# Altium PCB BLDC_driver_sensorless_v2.PcbDoc
Units mil, origin at the board's own origin, x right, y up, seen from the top; angles counter-clockwise.
Board outline 2626.88 x 1780 mil, 2 copper layers (Top Layer, Bottom Layer); 95 components, 64 nets, 263 pads, 50 vias.
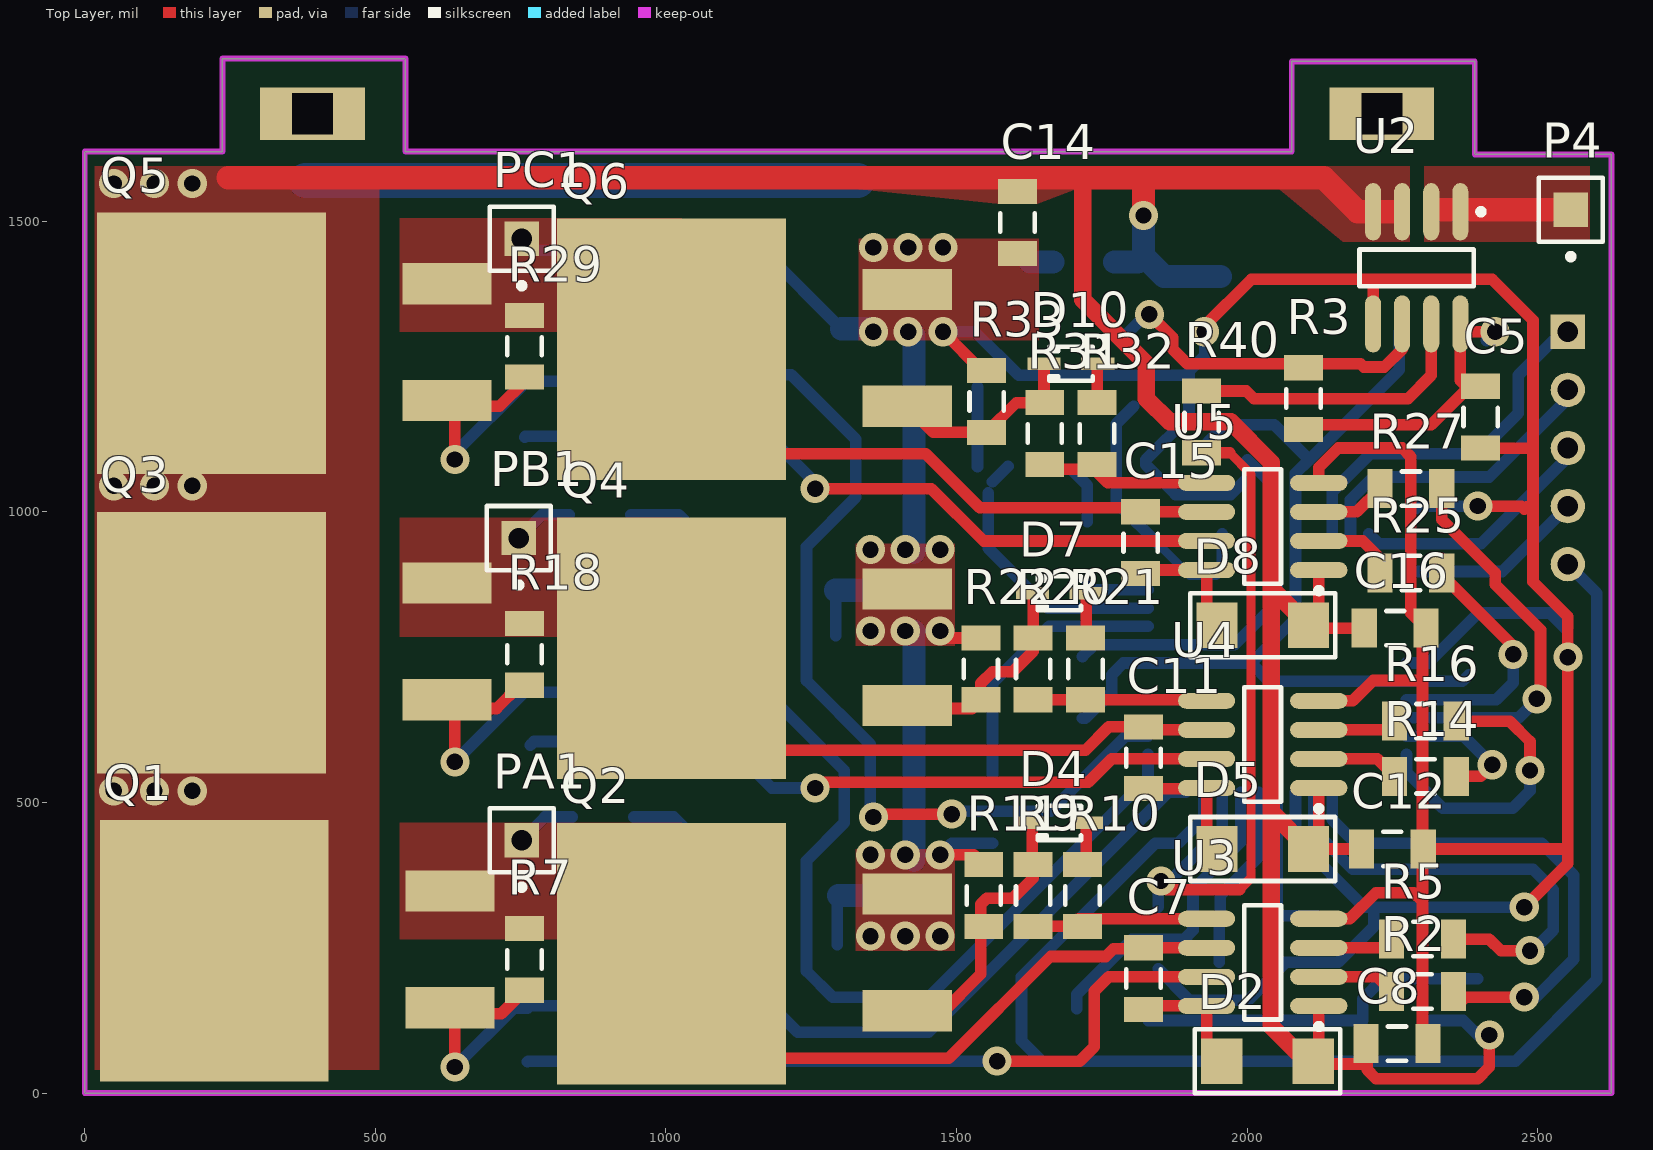
[diagram p0: Top Layer view]
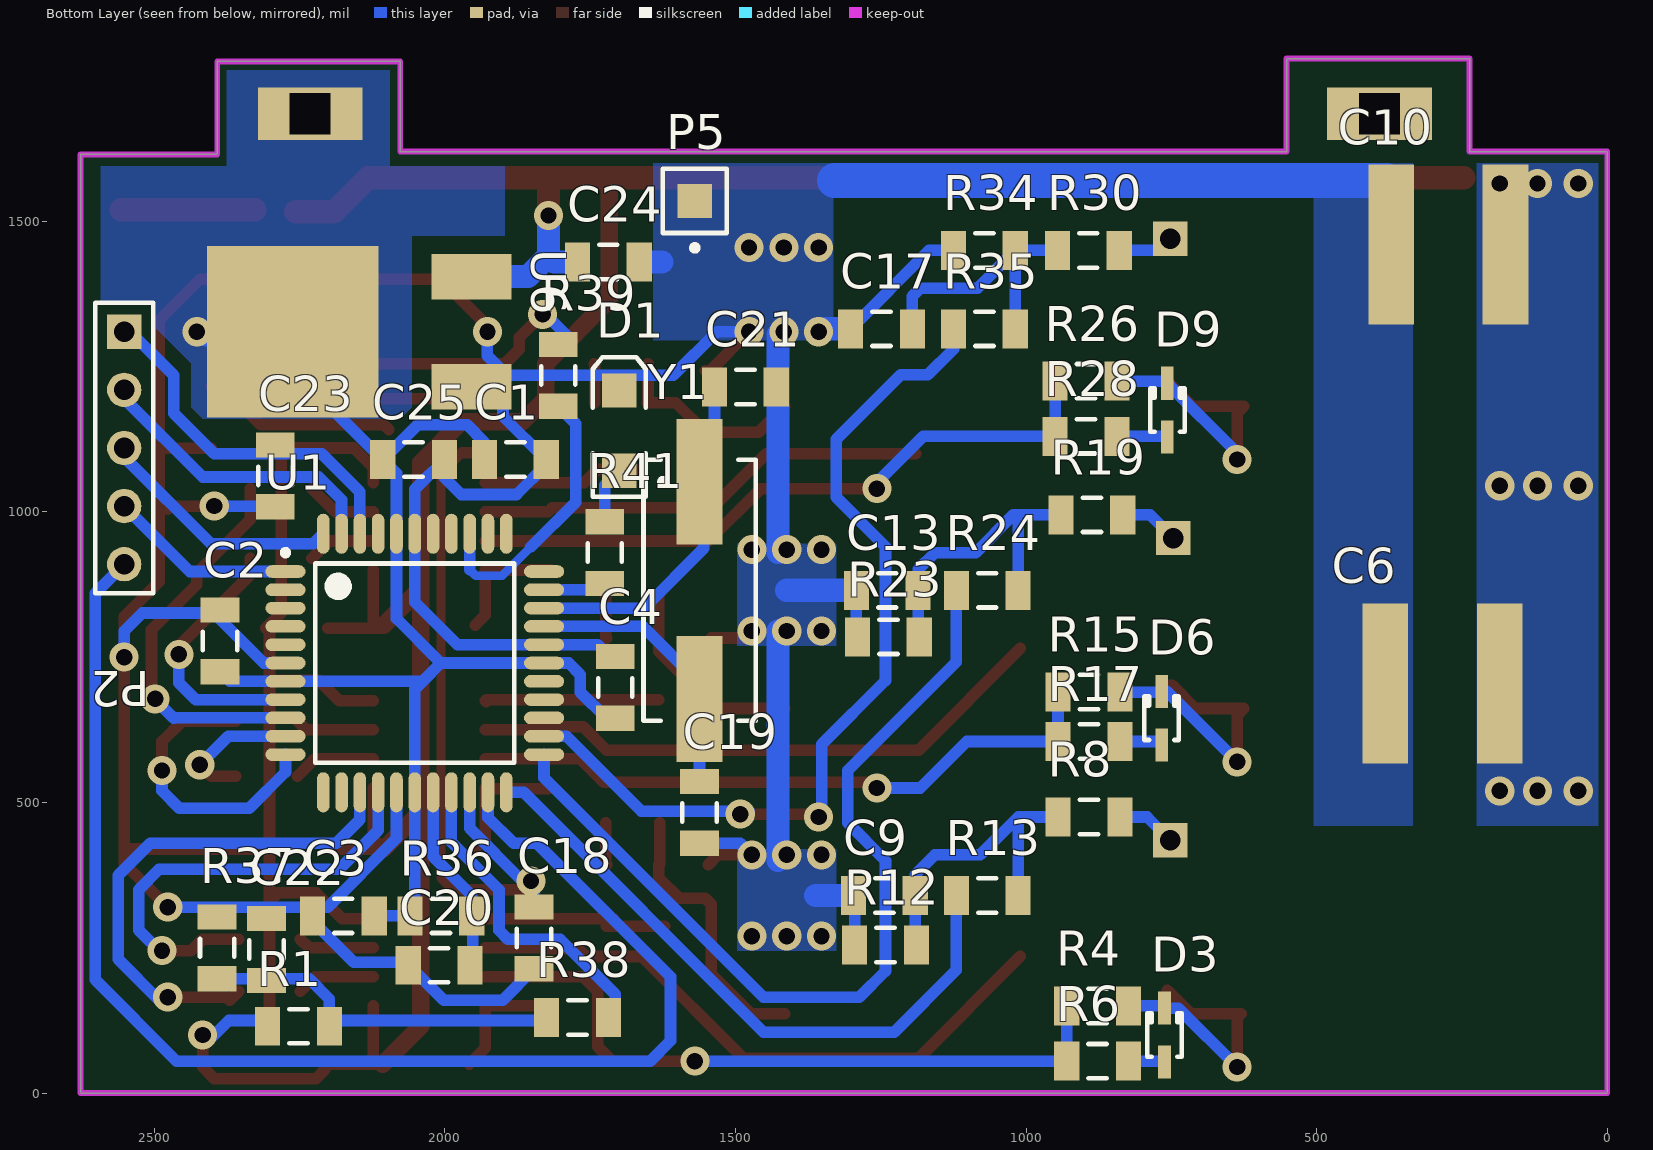
[diagram p1: Bottom Layer view, seen from below]
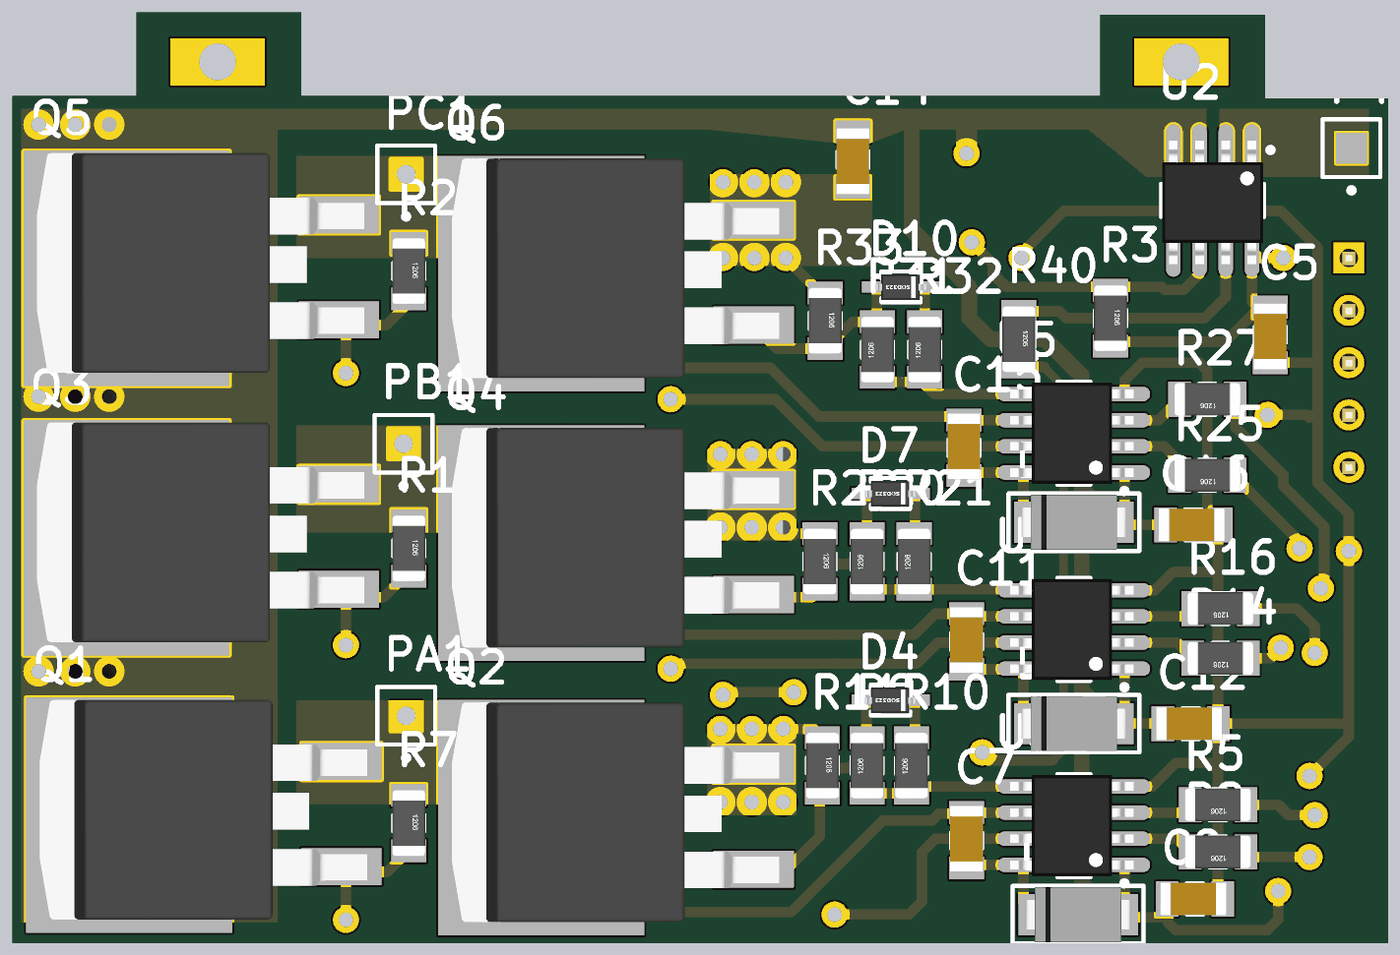
[diagram p2: 3D render of the assembled board from above, using the file's embedded part models]
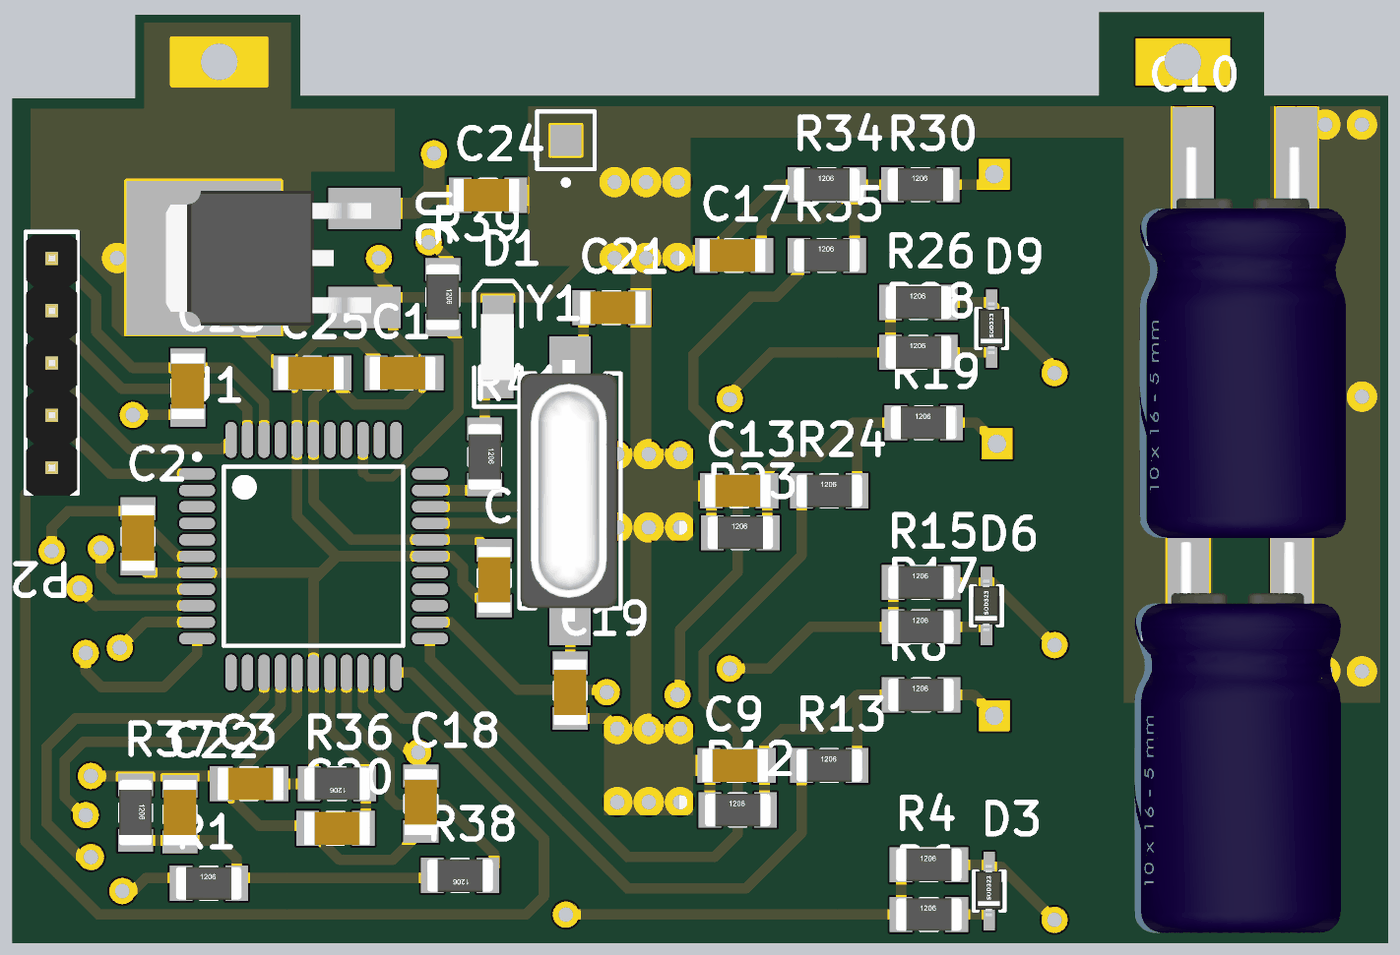
[diagram p3: 3D render of the assembled board from below, using the file's embedded part models]

## Layer stack, top to bottom
Top Solder: solder mask 0.4, Solder Resist, Dk 3.5
Top Layer: signal copper 1.4
Dielectric 1: dielectric 12.6, FR-4, Dk 4.8
Bottom Layer: signal copper 1.4
Bottom Solder: solder mask 0.4, Solder Resist, Dk 3.5

## Board outline
0,0 0,1620 236.88,1620 236.88,1780 551.88,1780 551.88,1620 2076.88,1620 2076.88,1775 2391.88,1775 2391.88,1615 2626.88,1615 2626.88,0

## Design rules (kind name [scope] priority, off if disabled: settings)
Clearance [All] p1: gap=10
HoleSize [All] p1: absolutevalues=TRUE maxlimit=200 minlimit=1 maxpercent=80.000 minpercent=20.000
PolygonConnect [All] p1: connectstyle=Direct reliefconductorwidth=10 reliefentries=4 polygonreliefangle="90 Angle" airgapwidth=10
RoutingVias [All] p1: holewidth=28 width=50 viastyle="Through Hole" minholewidth=28 minwidth=50 maxholewidth=28 maxwidth=50
SolderMaskExpansion [All] p1: expansion=4
Width [All] p1: maxlimit=200 minlimit=15 preferedwidth=20 minimp=50.000000 maximp=50.000000 favimp=50.000000
29 further rules are at their usual default settings.

## Classes and differential pairs
component class BLDC_driver_sensorless_power: C5 C6 C7 C8 C9 C10 C11 C12 C13 C14 C15 C16 C17 C22 D2 D3 D4 D5 D6 D7 D8 D9 D10 P4 P5 PA1 PB1 PC1 Q1 Q2 Q3 Q4 Q5 Q6 R1 R2 R3 R4 R5 R6 R7 R8 R9 R10 R11 R12 R13 R14 R15 R16 R17 R18 R19 R20 R21 R22 R23 R24 R25 R26 R27 R28 R29 R30 R31 R32 R33 R34 R35 R37 R38 U2 U3 U4 U5
component class BLDC_driver_sensorless_logic: C1 C2 C3 C4 C18 C19 C20 C21 C23 C24 C25 D1 P2 R36 R39 R40 R41 U1 U6 Y1

## Components (designator, comment, footprint, x,y, rotation, side; value= is the part's Value field where it differs from the comment)
C1 "Cap SMD" "1206 capacitor" 1876.88,1090 r0 bottom
C2 "Cap SMD" "1206 capacitor" 2386.88,780 r270 bottom
C3 "Cap SMD" "1206 capacitor" 2176.88,305 r180 bottom
C4 "Cap SMD" "1206 capacitor" 1706.88,700 r270 bottom
C5 "Cap SMD" "1206 capacitor" 2401.88,1165 r270 top
C6 "Cap pol" "Cap elec 10x16-5 Surface Mount" 185,705 r0 bottom
C7 "Cap SMD" "1206 capacitor" 1821.88,195 r90 top
C8 "Cap SMD" "1206 capacitor" 2260,85 r180 top
C9 "Cap SMD" "1206 capacitor" 1241.88,340 r0 bottom
C10 "Cap pol" "Cap elec 10x16-5 Surface Mount" 175,1460 r0 bottom
C11 "Cap SMD" "1206 capacitor" 1821.88,575 r90 top
C12 "Cap SMD" "1206 capacitor" 2251.88,420 r180 top
C13 "Cap SMD" "1206 capacitor" 1236.88,865 r0 bottom
C14 "Cap SMD" "1206 capacitor" 1605,1500 r270 top
C15 "Cap SMD" "1206 capacitor" 1816.88,945 r90 top
C16 "Cap SMD" "1206 capacitor" 2256.88,800 r180 top
C17 "Cap SMD" "1206 capacitor" 1246.88,1315 r0 bottom
C18 "Cap SMD" "1206 capacitor" 1846.88,265 r90 bottom
C19 "Cap SMD" "1206 capacitor" 1561.88,485 r270 bottom
C20 "Cap SMD" "1206 capacitor" 2011.88,220 r180 bottom
C21 "Cap SMD" "1206 capacitor" 1485,1215 r180 bottom
C22 "Cap SMD" "1206 capacitor" 2306.88,245 r90 bottom
C23 "Cap SMD" "1206 capacitor" 2291.88,1060 r90 bottom
C24 "Cap Semi" "1206 capacitor" 1716.88,1430 r0 bottom
C25 "Cap Semi" "1206 capacitor" 2051.88,1090 r0 bottom
D1 "LED2" "LED 1206 BLUE" 1700,1140 r90 bottom
D2 "Diode ES1G" DO-214AC 2035,55 r180 top
D3 "1N4148WS" SOD323 761.88,100 r90 bottom
D4 "1N4148WS" SOD323 1676.88,465 r180 top
D5 "Diode ES1G" DO-214AC 2026.88,420 r180 top
D6 "1N4148WS" SOD323 766.88,645 r90 bottom
D7 "1N4148WS" SOD323 1676.88,860 r180 top
D8 "Diode ES1G" DO-214AC 2026.88,805 r180 top
D9 "1N4148WS" SOD323 756.88,1175 r90 bottom
D10 "1N4148WS" SOD323 1696.88,1255 r180 top
P2 "Header 5" HDR1X5 2551.88,1310 r270 bottom
P4 "Plug" PIN1#1 2556.88,1520 r180 top
P5 "Plug" PIN1#1 1570,1535 r0 bottom
PA1 "Plug" PIN1#2 751.88,435 r180 top
PB1 "Plug" PIN1#2 746.88,955 r180 top
PC1 "Plug" PIN1#2 751.88,1470 r180 top
Q1 "STB85NF55T4" TO-263-2 30,5 r90 top
Q2 "STB85NF55T4" TO-263-2 816.88,0 r90 top
Q3 "STB85NF55T4" TO-263-2 25,535 r90 top
Q4 "STB85NF55T4" TO-263-2 816.88,525 r90 top
Q5 "STB85NF55T4" TO-263-2 25,1050 r90 top
Q6 "STB85NF55T4" TO-263-2 816.88,1040 r90 top
R1 "Res3" "1206 resistor" 2251.88,115 r180 bottom
R2 "Res3" "1206 resistor" 2301.88,175 r180 top
R3 "Res3" "1206 resistor" 2096.88,1195 r270 top
R4 "Res3" "1206 resistor" 876.88,150 r180 bottom
R5 "Res3" "1206 resistor" 2301.88,265 r180 top
R6 "Res3" "1206 resistor" 876.88,55 r180 bottom
R7 "Res3" "1206 resistor" 756.88,230 r270 top
R8 "Res3" "1206 resistor" 891.88,475 r180 bottom
R9 "Res3" "1206 resistor" 1631.88,340 r90 top
R10 "Res3" "1206 resistor" 1716.88,340 r90 top
R11 "Res3" "1206 resistor" 1546.88,340 r270 top
R12 "Res3" "1206 resistor" 1241.88,255 r180 bottom
R13 "Res3" "1206 resistor" 1066.88,340 r180 bottom
R14 "Res3" "1206 resistor" 2306.88,545 r180 top
R15 "Res3" "1206 resistor" 891.88,690 r180 bottom
R16 "Res3" "1206 resistor" 2306.88,640 r180 top
R17 "Res3" "1206 resistor" 891.88,605 r180 bottom
R18 "Res3" "1206 resistor" 756.88,755 r270 top
R19 "Res3" "1206 resistor" 886.88,995 r180 bottom
R20 "Res3" "1206 resistor" 1631.88,730 r90 top
R21 "Res3" "1206 resistor" 1721.88,730 r90 top
R22 "Res3" "1206 resistor" 1541.88,730 r270 top
R23 "Res3" "1206 resistor" 1236.88,785 r180 bottom
R24 "Res3" "1206 resistor" 1066.88,865 r180 bottom
R25 "Res3" "1206 resistor" 2281.88,895 r180 top
R26 "Res3" "1206 resistor" 896.88,1225 r180 bottom
R27 "Res3" "1206 resistor" 2281.88,1040 r180 top
R28 "Res3" "1206 resistor" 896.88,1130 r180 bottom
R29 "Res3" "1206 resistor" 756.88,1285 r270 top
R30 "Res3" "1206 resistor" 893.02,1449.99 r180 bottom
R31 "Res3" "1206 resistor" 1651.88,1135 r90 top
R32 "Res3" "1206 resistor" 1741.88,1135 r90 top
R33 "Res3" "1206 resistor" 1551.88,1190 r270 top
R34 "Res3" "1206 resistor" 1071.88,1449.99 r180 bottom
R35 "Res3" "1206 resistor" 1071.88,1315 r180 bottom
R36 "Res3" "1206 resistor" 2006.88,305 r0 bottom
R37 "Res3" "1206 resistor" 2391.88,250 r270 bottom
R38 "Res3" "1206 resistor" 1771.88,130 r0 bottom
R39 "Res3" "1206 resistor" 1805,1235 r270 bottom
R40 "Res3" "1206 resistor" 1921.88,1155 r270 top
R41 "Res3" "1206 resistor" 1725,930 r270 bottom
U1 "DSPIC30F3011-30I/PT" TQFP-PT44_N 2051.88,740 r180 bottom
U2 "ACS711" SOIC8 2291.88,1420 r270 top
U3 "FAN7382M" SOIC8 2026.88,225 r180 top
U4 "FAN7382M" SOIC8 2026.88,600 r180 top
U5 "FAN7382M" SOIC8 2026.88,975 r180 top
U6 "AP1117ID50G" TO-252 2241.88,1310 r180 bottom
Y1 "XTAL" HC49/US 1561.88,860 r270 bottom

## Footprints (in the part's own frame and the unit in brackets; to place one, negate y for a bottom-side part, rotate by r counter-clockwise, add the part's x,y. Pads: shape width x height; smd on the part's side, far side on the other; paste and mask are expansions set on the pad)
"1206 capacitor" [mm]
  rect 1.1x1.7 smd: 1(-1.299,0) 2(1.401,0)
  silkscreen extent -0.35,-0.75 0.45,0.75, body extent -1.47,-0.8 1.73,0.8, height 1
"1206 resistor" [mm]
  rect 1.1x1.7 smd: 1(-1.35,0) 2(1.35,0)
  silkscreen extent -0.4,-0.75 0.4,0.75, body extent -1.6,-0.8 1.6,0.8, height 1
"Cap elec 10x16-5 Surface Mount" [mm]
  rect 2x7 smd: 1(0,0) 2(5,0)
  body extent -2.4,-1.6 7.6,17.4, height 10
DO-214AC [mm]
  rect 1.8x2 smd: A(-2,0) K(2,0)
  silkscreen extent -3.17,-1.4 3.17,1.4, body extent -2.55,-1.33 2.55,1.33, height 2.17
HC49/US [mm] "Crystal oscillator smd"
  rect 5.5x2 smd: 1(-4.877,0) 2(4.623,0)
  silkscreen extent -5.83,-2.45 5.57,2.45, body extent -6.48,-2.41 6.22,2.29, height 4.2
HDR1X5 [mm] "Connector; Header; 5 Position"
  rect 1.5x1.5 hole 0.9: 1(0,0)
  round 1.5 hole 0.9: 2(2.54,0) 3(5.08,0) 4(7.62,0) 5(10.16,0)
  silkscreen extent -1.27,-1.27 11.43,1.27, body extent -1.15,-1.25 11.55,1.25, height 8.2
"LED 1206 BLUE" [mm] "SMT BLUE LED; 2 Flat Leads"
  rect 1.5x1.5 smd: 1(-1.75,0) 2(1.75,0)
  silkscreen extent -2.9,-1.15 3.2,1.15, body extent -1.6,-0.79 1.6,0.81, height 1.11
PIN1#1 [mm] "Connector; Plug"
  rect 1.5x1.5 smd: 1(0,0)
  silkscreen extent -1.4,-1.4 1.4,2.17
PIN1#2 [mm] "Connector; Plug"
  rect 1.5x1.5 hole 0.9: 1(0,0)
  silkscreen extent -1.4,-1.4 1.4,2.17
SOD323 [mm]
  rect 1.45x0.55 smd: 1(1.175,0) 2(-1.175,0)
  silkscreen extent -0.95,-0.75 0.95,0.75, body extent -1.22,-0.61 1.28,0.64, height 1
SOIC8 [mm]
  oval 2.5x0.7 smd: 1(-2.45,1.905) 2(-2.45,0.635) 3(-2.45,-0.635) 4(-2.45,-1.905) 5(2.45,-1.905) 6(2.45,-0.635) 7(2.45,0.635) 8(2.45,1.905)
  silkscreen extent -2.57,-2.5 0.8,2.93, body extent -2.9,-2.45 3.1,2.45, height 1.75
TO-252 [mm] "3 pins"
  rect 3.5x2 smd: 1(7.3,-2.4) 3(7.3,2.4)
  rect 7.5x7.5 smd: 2(-0.5,0)
  body extent -2.33,-3.27 7.61,3.27, height 2.29
TO-263-2 [mm] "D2PAK, 2 leads"
  rect 1.8x3.9 smd: 1(3.6,-15.2) 3(8.7,-15.2)
  rect 11.43x10 smd: tab(6.1,-4.9)
  body extent 1.03,-16.44 11.7,-0.56, height 4.83
TQFP-PT44_N [mm] "Thin QFP, 44-Leads, Body 10x10mm, Pitch 0.8mm, IPC Medium Density"
  oval 1.75x0.55 smd: 1(-5.65,4) 2(-5.65,3.2) 3(-5.65,2.4) 4(-5.65,1.6) 5(-5.65,0.8) 6(-5.65,0) 7(-5.65,-0.8) 8(-5.65,-1.6) 9(-5.65,-2.4) 10(-5.65,-3.2) 11(-5.65,-4) 23(5.65,-4) 24(5.65,-3.2) 25(5.65,-2.4) 26(5.65,-1.6) 27(5.65,-0.8) 28(5.65,0) 29(5.65,0.8) 30(5.65,1.6) 31(5.65,2.4) 32(5.65,3.2) 33(5.65,4)
  oval 0.55x1.75 smd: 12(-4,-5.65) 13(-3.2,-5.65) 14(-2.4,-5.65) 15(-1.6,-5.65) 16(-0.8,-5.65) 17(0,-5.65) 18(0.8,-5.65) 19(1.6,-5.65) 20(2.4,-5.65) 21(3.2,-5.65) 22(4,-5.65) 34(4,5.65) 35(3.2,5.65) 36(2.4,5.65) 37(1.6,5.65) 38(0.8,5.65) 39(0,5.65) 40(-0.8,5.65) 41(-1.6,5.65) 42(-2.4,5.65) 43(-3.2,5.65) 44(-4,5.65)
  silkscreen extent -5.77,-4.35 4.35,4.95, body extent -5,-5 5,5, height 1.2

## Part data
C1 C2 C3 C4 C5 C7 C8 C9 C11 C12 C13 C14 C15 C16 C17 C18 C19 C20 C21 C22 C23: "SMD capacitor"
C6 C10: "Capa pol through hole"
C24 C25: "Capacitor (Semiconductor SIM Model)"
D1: "Typical RED, GREEN, YELLOW, AMBER GaAs LED"
D2 D5 D8: "1.0A SURFACE MOUNT SUPER-FAST RECTIFIER"
D3 D4 D6 D7 D9 D10: "Diode commutation"
P2: "Header, 5-Pin"
Q1 Q2 Q3 Q4 Q5 Q6: "MOSFET Canal-N, 80A 55V"
R1 R2 R3 R4 R5 R6 R7 R8 R9 R10 R11 R12 R13 R14 R15 R16 R17 R18 R19 R20 R21 R22 R23 R24 R25 R26 R27 R28 R29 R30 R31 R32 R33 R34 R35 R36 R37 R38 R39 R40 R41: "Resistor"
U1: "High-Performance 16-bit Digital Signal Controller, 24 KB Flash, 1 KB SRAM, 1 KB EEPROM, 44-Pin TQFP, Industrial Temperature"
U2: "+/-12A HALL EFFECT CURRENT SENSOR"
U3 U4 U5: "High and Low Side Gate Driver"
U6: "LDO Voltage Regulator"
Y1: "Crystal Oscillator"

## Free pads (board coordinates)
  rect 180x90 hole 70 square: 0(391.88,1685) 0(2231.88,1685)

## Via types
v1: diameter 50, hole 28, Top Layer to Bottom Layer, 50 vias

## Nets (pads, with @x,y where several pads share a name; then routed paths per layer and width w, separated by ;. In a path a pad name is that pad's centre, name@x,y a point inside that pad or via, vN(x,y) a via of type N, cw(c..) or ccw(c..) an arc to the next point about the centre after c; other vN are vias at no path point)
COMPWM: C23.2 P2.1 U1.42 | length 629.8
  Bottom Layer w20: U1.42 2146.36,1034.49 2211.88,1100 2396.88,1100 2466.88,1170 2466.88,1235 2541.88,1310 P2.1
CURRENT: R40.1 U2.7 | length 505.6
  Top Layer w20: R40.1 1998.73,1208.15 2011.88,1195 2276.88,1195 2316.88,1235 U2.7
FAULT: R3.1 R39.1 U2.6 | length 609.2
  Top Layer w20: v1(1831.88,1340) 1871.88,1300 1871.88,1280 1896.88,1255 2195.14,1255 2200.81,1249.33 2236.21,1249.33 2266.88,1280 U2.6
  Bottom Layer w20: R39.1@1781.88,1295 1826.88,1340 v1(1831.88,1340)
GND: C1.1 C2.1 C3.1 C4.1 C5.2 C6.2 C8.1 C9.2 C10.2 C12.1 C13.2 C14.2 C16.1 C17.2 C18.1 C19.2 C20.1 C21.2 C22.2 C23.1 C24.1 C25.1 D1.2 P5.1 Q2.3 Q4.3 Q6.3 R11.1 R12.1 R22.1 R23.1 R33.1 R34.1 R37.1 U1.6 U1.16 U1.29 U1.39 U2.5 U3.4 U4.4 U5.4 U6.1 | length 9643.2
  Top Layer w20: v1(1471.88,410) 1530.02,410 R11.1 ; v1(1471.88,795) v1@1478.73,788.15 ; v1(1476.88,1310) 1543.73,1243.15 R33.1 ; v1@1478.73,783.15 R22.1 ; v1(1926.88,1310) 1926.88,1320 2006.88,1400 2216.88,1400 ; U3.4 2176.88,300 2221.88,345 2286.88,345 2301.88,330 ; U4.4 2181.88,675 2216.88,710 2301.88,710 ; U5.4 2123.33,1076.46 2156.88,1110 2266.88,1110 2281.88,1095 2281.88,826.15 C16.1 ; U2.5 2216.88,1400 ; C16.1@2301.88,793.86 2301.88,710 ; C12.1 2551.87,420.01 ; C8.1@2313.02,98.85 2301.88,110 2301.88,330 ; v1@2401.87,1005.01 v1(2396.88,1010) 2471.88,1010 2476.88,1005 2480.73,1008.85 ; C5.2 2486.72,1109.85 ; v1(2476.87,319.99) 2551.88,395 v1(2551.88,750) 2551.88,820 2491.88,880 2491.88,1330 2421.88,1400 2216.88,1400 ; 2301.88,330 2301.88,710
  Bottom Layer w20: R34.1 1167.04,1449.99 C17.2 ; R23.1@1292.03,787 C13.2 ; R12.1 C9.2@1295.02,338 ; v1@1351.87,1315.01 v1(1356.88,1310) ; v1(1471.88,410) 1491.72,429.85 C19.2 ; v1(1476.88,1310) 1531.88,1310 1606.88,1235 U6.1@1891.88,1235 ; C4.1@1716.88,751.15 1737.23,771.5 U1.29 1978.37,771.5 2051.88,845 U1.39 2051.88,1038.86 C25.1 2000.73,1058.85 1971.88,1030 1876.88,1030 1825.73,1081.15 C1.1 1900,1164.28 1900,1241.98 1926.88,1268.86 v1(1926.88,1310) ; C18.1 1900.72,160 2001.88,160 C20.1@2064.95,223.07 ; C20.1@2063.02,224.99 2156.87,224.99 2218.02,286.15 C3.1@2218.02,319.99 ; U1.16 2083.37,438.5 2201.88,319.99 C3.1@2218.02,319.99 ; U1.6 2311.88,740 2398.02,826.15 2520.73,826.15 2551.88,795 v1(2551.88,750) ; C23.1 2295.72,1005 2300.72,1010 v1(2396.88,1010) ; v1(2476.87,319.99) C3.1@2218.02,319.99
  Bottom Layer w40: C13.2 1411.87,865.01 ; C9.2 1361.88,340.01 ; C17.2 v1@1351.87,1315.01 ; v1@1426.88,400 v1@1426.88,795 ; v1@1426.88,930 v1@1426.88,1305 ; 1626.88,1430.01 C24.1
  Bottom Layer w60: C10.2@380,1570 1330,1570
  other v1: 1351.88,270 1411.88,270 1471.88,270 1351.88,410 1411.88,410 1351.88,795 1411.88,795 1351.88,935 1411.88,935 1471.88,935 1416.88,1310 1356.88,1455 1416.88,1455 1476.88,1455
HIN1: R2.1 U1.14 | length 893.3
  Top Layer w20: R2.1 2370.02,160 2375.02,165 v1(2476.88,165)
  Bottom Layer w20: U1.14 2146.36,470.51 2186.88,430 2506.88,430 2561.88,375 2561.88,230 2491.88,160 2486.88,165 v1(2476.88,165)
HIN2: R14.1 U1.10 | length 238
  Top Layer w20: R14.1 2401.88,545 v1(2421.88,565)
  Bottom Layer w20: U1.10 2372.86,614.02 v1(2421.88,565)
HIN3: R25.1 U1.8 | length 460.5
  Top Layer w20: R25.1@2335.02,920 2335.02,891.85 2457.88,769 v1(2457.88,755)
  Bottom Layer w20: U1.8 2428.88,677.01 2457.88,706 v1(2457.88,755)
LIN1: R5.1 U1.15 | length 772.4
  Top Layer w20: R5.1 2416.88,265 2436.88,245 v1(2486.88,245)
  Bottom Layer w20: U1.15 2114.87,452.01 2181.88,385 2491.88,385 2526.88,350 2526.88,280 v1@2496.88,250
LIN2: R16.1 U1.11 | length 507.2
  Top Layer w20: R16.1 2451.88,640 2486.88,605 v1(2486.88,555)
  Bottom Layer w20: U1.11 2274.32,552.56 2336.88,490 2456.88,490 2486.88,520 v1(2486.88,555)
LIN3: R27.1 U1.9 | length 673.7
  Top Layer w20: R27.1 2335.02,986.85 2426.88,895 2426.88,875 2504.88,797 2504.88,769.47 2504.88,684.82 v1(2498.47,678.41)
  Bottom Layer w20: U1.9 2466.88,645.51 ; 2466.88,645 2498.47,676.59 v1(2498.47,678.41)
MCLR: C20.2 R36.1 U1.18 | length 307
  Bottom Layer w20: C20.2@1951.88,224.99 R36.1@1951.88,291.85 ; R36.1 1953.73,340 2020.38,406.65 U1.18
NetC7_1: C7.1 D2.K U3.8 | length 213.9
  Top Layer w20: C7.1@1828.03,150 U3.8 1930.42,77.72 D2.K@1958.13,50
NetC7_2: C7.2 PA1.1 Q1.3 Q2.tab R7.1 R8.2 U3.6 | length 1176.6
  Top Layer w20: Q2.tab@1009.79,235.16 1184.95,60 1486.88,60 1661.88,235 1756.88,235 1770.07,248.2 1821.88,248.2 C7.2 1822.03,250 U3.6
  Bottom Layer w20: PA1.1 791.88,475 R8.2
NetC9_1: C9.1 R8.1 R12.2 R13.2 | length 540.8
  Bottom Layer w20: R8.1 1013.73,475 ; R13.2 1013.73,475 ; R12.2@1190.73,257 C9.1 1190.73,376.15 1156.88,410 1078.73,410 1013.73,475
NetC11_1: C11.1 D5.K U4.8 | length 221.4
  Top Layer w20: C11.1 1929.27,523.85 U4.8 1930.42,437.72 D5.K
NetC11_2: C11.2 PB1.1 Q3.3 Q4.tab R18.1 R19.2 U4.6 | length 1115.4
  Top Layer w20: Q4.tab 1184.95,590 1721.88,590 1762.03,630.15 C11.2 1827.03,625 U4.6
  Bottom Layer w20: PB1.1 786.88,995 R19.2
NetC13_1: C13.1 R19.1 R23.2 R24.2 | length 528.7
  Bottom Layer w20: R19.1 1013.73,995 ; R24.2 1013.73,995 ; R23.2@1185.73,787 C13.1 1185.73,901.15 1156.88,930 1086.88,930 1021.88,995 1013.73,995
NetC15_1: C15.1 D8.K U5.8 | length 216.4
  Top Layer w20: C15.1@1816.88,898.85 1818.03,900 U5.8 1930.42,822.72 D8.K
NetC15_2: C15.2 PC1.1 Q5.3 Q6.tab R29.1 R30.2 U5.6 | length 870.9
  Top Layer w20: Q6.tab@1189.95,1100 1446.88,1100 1539.88,1007 1815.03,1007 C15.2@1816.88,1005.15 ; C15.2@1822.03,1000 U5.6
  Bottom Layer w20: PC1.1 771.88,1449.99 R30.2
NetC17_1: C17.1 R30.1 R34.2 R35.2 | length 473.3
  Bottom Layer w20: R30.1 R34.2 ; R35.2 R34.2 ; C17.1 1195.73,1371.15 1181.88,1385 1083.72,1385 R34.2
NetC18_2: C18.2 R40.2 U1.20 | length 1200.5
  Top Layer w16: 1970.02,1101.85 2006.88,1065 2006.88,370 1986.88,350
  Top Layer w20: v1@1861.88,350 1986.88,350 ; R40.2 1970.02,1101.85
  Bottom Layer w20: C18.2 1846.87,359.99 v1(1851.88,365) 1866.88,365 1957.39,455.51 U1.20
NetC22_1: C22.1 R1.2 R37.2 R38.2 | length 618.2
  Bottom Layer w20: R38.2@1830.02,125 2198.73,125 2198.73,161.85 2233.73,196.85 R37.2@2396.88,196.85
NetD1_1: D1.1 R41.1 | length 98.3
  Bottom Layer w20: D1.1 1725,1046.1 R41.1
NetD3_1: D3.1 Q1.1 R4.2 R7.2 | length 468
  Top Layer w20: v1(636.88,45) 636.88,130.16 630.3,136.73 716.76,136.73 R7.2
  Bottom Layer w20: v1(636.88,45) 738.13,146.26 D3.1 765.62,150 R4.2
NetD3_2: D3.2 R6.2 | length 62.4
  Bottom Layer w20: D3.2 763.13,55 R6.2
NetD4_1: D4.1 Q2.1 R9.2 R11.2 | length 477.2
  Top Layer w20: Q2.1@1415.3,136.73 1473.61,136.73 1541.88,205 1541.88,286.85 1541.88,325 1551.88,335 1596.88,335 1631.88,370 R9.2 ; R9.2@1630.62,394.41 D4.1
NetD4_2: D4.2 R10.2 | length 72.4
  Top Layer w20: R10.2@1721.88,393.15 1723.13,394.41 D4.2
NetD6_1: D6.1 Q3.1 R15.2 R18.2 | length 497.3
  Top Layer w20: v1(636.88,570) 636.88,650.16 625.3,661.73 708.61,661.73 748.73,701.85 R18.2
  Bottom Layer w20: v1(636.88,570) 758.13,691.26 D6.1 768.13,690 R15.2
NetD6_2: D6.2 R17.2 | length 74.4
  Bottom Layer w20: D6.2 773.13,605 R17.2
NetD7_1: D7.1 Q4.1 R20.2 R22.2 | length 374.3
  Top Layer w20: Q4.1@1415.3,661.73 1526.76,661.73 R22.2 1541.88,705 1561.88,725 1596.88,725 1631.88,760 R20.2 1631.88,858.74 D7.1
NetD7_2: D7.2 R21.2 | length 77.4
  Top Layer w20: R21.2 1723.13,784.41 D7.2
NetD9_1: D9.1 Q5.1 R26.2 R29.2 | length 522.2
  Top Layer w20: v1(636.88,1090) 636.88,1170.16 625.3,1181.73 713.61,1181.73 756.88,1225 R29.2
  Bottom Layer w20: v1(636.88,1090) 636.88,1101.26 D9.1 760.62,1225 R26.2
NetD9_2: D9.2 R28.2 | length 87.4
  Bottom Layer w20: D9.2 758.13,1130 R28.2
NetD10_1: D10.1 Q6.1 R31.2 R33.2 | length 343.8
  Top Layer w20: Q6.1 1460.18,1136.85 R33.2 1603.17,1188.15 R31.2 1650.62,1189.41 D10.1
NetD10_2: D10.2 R32.2 | length 67.4
  Top Layer w20: R32.2 1741.88,1253.74 D10.2
NetR2_2: R2.2 U3.2 | length 135.7
  Top Layer w20: U3.2 2223.73,200 R2.2
NetR4_1: R4.1 R6.1 U3.7 | length 1211.1
  Top Layer w20: v1(1570,55) 1711.88,55 1736.88,80 1736.88,175 1761.88,200 U3.7
  Bottom Layer w20: R4.1 R6.1 v1(1570,55)
NetR5_2: R5.2 U3.3 | length 131.6
  Top Layer w20: U3.3 2233.73,250 R5.2
NetR9_1: R9.1 R10.1 U3.5 | length 320.4
  Top Layer w20: R9.1@1621.88,286.85 R10.1@1721.88,286.85 ; R10.1@1710.02,300 U3.5
NetR14_2: R14.2 U4.2 | length 142.8
  Top Layer w20: U4.2 2223.73,575 R14.2
NetR15_1: R15.1 R17.1 U4.7 | length 1124.2
  Top Layer w20: v1(1256.88,525) 1266.88,535 1726.88,535 1766.88,575 U4.7
  Bottom Layer w20: R15.1 R17.1 1101.88,605 1181.88,525 v1(1256.88,525)
NetR16_2: R16.2 U4.3 | length 136.6
  Top Layer w20: U4.3 2238.73,625 R16.2
NetR20_1: R20.1 R21.1 U4.5 | length 301.9
  Top Layer w20: R20.1 R21.1 1928.57,676.85 U4.5 U4.5@1928.57,673.15
NetR25_2: R25.2 U5.2 | length 117.8
  Top Layer w20: U5.2 2198.73,950 R25.2@2228.73,920
NetR26_1: R26.1 R28.1 U5.7 | length 1155.8
  Top Layer w20: v1(1256.88,1040) 1426.88,1040 1456.88,1040 1546.88,950 U5.7
  Bottom Layer w20: R26.1 R28.1 1176.88,1130 1256.88,1050 v1(1256.88,1040)
NetR27_2: R27.2 U5.3 | length 122
  Top Layer w20: U5.3 2188.73,1000 R27.2
NetR31_1: R31.1 R32.1 U5.5 | length 268.1
  Top Layer w20: R31.1@1671.88,1073.15 1736.88,1073.15 1760.02,1050 U5.5
NetR39_2: R39.2 U1.36 | length 478.6
  Bottom Layer w15: 1851.88,940 1901.88,890 1946.88,890 1957.39,900.51
  Bottom Layer w20: R39.2 1775,1151.85 1775,1016.88 1851.88,940 ; 1957.39,900.51 U1.36
NetR41_2: R41.2 U1.32 | length 108.9
  Bottom Layer w20: R41.2 1735.87,865.98 U1.32
OSC1: C19.1 U1.30 Y1.2 | length 477
  Bottom Layer w20: C19.1 Y1.2 1561.88,705 1659.87,802.99 U1.30
OSC2: C21.1 U1.31 Y1.1 | length 588
  Bottom Layer w20: Y1.1@1536.15,1077.73 C21.1 ; Y1.1@1554.38,1032.5 1554.38,937.5 1657.39,834.49 U1.31 ; Y1.1 Y1.1@1588.72,1078.85
PGC/SDI: P2.4 U1.1 | length 324.2
  Bottom Layer w20: U1.1 2439.36,897.48 P2.4
PGD/SDO: P2.3 U1.44 | length 427.3
  Bottom Layer w20: U1.44 2226.8,945 2402.59,945 2551.88,1094.29 P2.3
RX: U1.3
S\S\: P2.5 U1.21 | length 2379.3
  Bottom Layer w20: U1.21 1925.89,474.02 1881.88,430 1841.88,430 1611.88,200 1611.88,90 1646.88,55 2461.88,55 2601.88,195 2601.88,860 P2.5
SCK: P2.2 U1.43 | length 519.6
  Bottom Layer w20: U1.43 2177.86,1020.98 2216.88,1060 2416.88,1060 2551.88,1195 P2.2
TX: U1.2
VA: R13.1 U1.22 | length 1117.7
  Bottom Layer w20: R13.1 1120.02,211.85 1226.88,105 1451.88,105 1864.43,517.56 U1.22
VB: R24.1 U1.23 | length 1561.9
  Bottom Layer w20: R24.1 1120.02,741.85 1306.88,555 1306.88,465 1241.88,400 1241.88,210 1286.88,165 1451.88,165 1829.43,542.56 U1.23
VBAT: P4.1 U2.1 U2.2 | length 230
  Top Layer w40: U2.2@2326.88,1520 P4.1
VBATSENS: C6.1 C8.2 C10.1 C12.2 C14.1 C16.2 C24.2 D2.A D5.A D8.A Q1.tab Q3.tab Q5.tab R1.1 U2.3 U2.4 U3.1 U4.1 U5.1 U6.3 | length 5284.6
  Top Layer w20: D2.A@2106.88,50 2115.62,50 2206.72,50.01 2206.72,40.15 2221.88,25 2396.88,25 2416.88,45 v1(2416.88,100) ; D8.A@2110.61,800.01 C16.2 ; D2.A@2123.33,57.72 U3.1 ; U4.1 2123.33,437.72 D5.A C12.2 ; D8.A@2123.33,812.73 U5.1
  Top Layer w30: 1716.88,1575 1716.88,1365 1826.88,1255 1826.88,1195 1866.88,1155 1971.88,1155 2041.88,1085 2041.88,868.74 ; D5.A 2041.88,483.75 ; D8.A 2041.88,868.74 ; D2.A@2106.88,50 2041.88,115 2041.88,483.75 ; 2041.88,483.75 2041.88,868.74
  Top Layer w40: 246.88,1575 1716.88,1575 1821.88,1575 ; v1(1821.88,1510) 1821.88,1575 ; U2.3@2256.88,1516.46 U2.4 2190.42,1516.46 2131.88,1575 1821.88,1575
  Bottom Layer w20: U6.3@1953.8,1405.16 U6.3 ; R1.1@2305.02,125 2371.88,125 2396.88,100 v1(2416.88,100)
  Bottom Layer w40: C24.2 1811.72,1430.01 1821.88,1440.16 ; v1(1821.88,1510) 1821.88,1440.16 ; U6.3@1953.8,1405.16 1856.88,1405.16 1821.88,1440.16
  other v1: 50,520 120,520 185,520 50,1045 120,1045 185,1045 50,1565 120,1565 185,1565
VBUS: R38.1 U1.19 | length 542.1
  Bottom Layer w20: R38.1@1706.88,145 1706.88,170 1801.88,265 1891.88,265 1906.88,280 1906.88,350 1988.88,432.01 U1.19
VC: R35.1 U1.24 | length 1594.1
  Top Layer w20: v1(1356.88,475) 1351.88,480 v1(1491.88,480)
  Bottom Layer w20: R35.1 1125.02,1279.98 1169.06,1235.94 1215.94,1235.94 1326.88,1125 1326.88,1025 1241.88,940 1241.88,710 1351.88,600 1351.88,480 v1(1356.88,475) ; v1@1476.88,485 v1@1486.88,485 ; v1(1491.88,480) v1@1486.88,485 ; U1.24 1790.89,614.02 1661.88,485 v1@1486.88,485
VDD: C1.2 C2.2 C3.2 C4.2 C5.1 C25.2 pad.0@2231.88,1685 R3.2 R36.2 U1.7 U1.17 U1.28 U1.40 U2.8 U6.2 | length 2667.5
  Top Layer w20: R3.2 2105.02,1150 2316.88,1150 2383.02,1216.15 C5.1 ; C5.1@2378.02,1215.01 2366.88,1226.15 U2.8 2380.42,1310 v1(2426.88,1310)
  Bottom Layer w20: C4.2@1716.88,644.85 1721.72,644.85 1766.88,690 1766.88,720 1786.88,740 U1.28 2006.88,740 ; C1.2 1932.03,1120.15 1961.88,1150 2047.03,1150 C25.2 ; C3.2 R36.2 2051.88,313.15 U1.17 2051.88,695 2038.37,708.5 ; U6.2 2261.56,1244.54 C25.2 ; C2.2@2381.88,719.85 2370.54,708.5 U1.7 2038.37,708.5 ; v1@2411.88,1295 v1(2426.88,1310) ; 2006.88,740 2038.37,708.5 ; 2006.88,740 2083.37,816.5 U1.40 2083.37,1066.35 C25.2
pads on no net: U1.4 U1.5 U1.12 U1.13 U1.25 U1.26 U1.27 U1.33 U1.34 U1.35 U1.37 U1.38 U1.41

## Polygon pours and split planes (outlines as drawn)
VBATSENS on Bottom Layer "Bottom Layer-No Net" (solid, remove dead copper, pour order 34): 225,1600 15,1600 15,460 225,460
GND on Bottom Layer "Bottom Layer-No Net" (solid, remove dead copper, pour order 32): 335,1600 505,1600 505,460 335,460
VDD on Bottom Layer "Bottom Layer-No Net" (solid, remove dead copper, pour order 2): 2411.88,1160 2076.88,1160 2056.88,1180 2056.88,1475 1896.88,1475 1896.88,1595 2095,1595 2095,1760 2375,1760 2375,1595 2591.88,1595 2591.88,1360 2496.88,1360 2496.88,1315 2476.88,1295 2436.88,1255 2436.88,1180 2416.88,1160
GND on Bottom Layer "Bottom Layer-No Net" (solid, remove dead copper, pour order 4): 1496.88,245 1326.88,245 1326.88,420 1496.88,420
GND on Bottom Layer "Bottom Layer-No Net" (solid, remove dead copper, pour order 6): 1496.88,770 1326.88,770 1326.88,945 1496.88,945
GND on Bottom Layer "Bottom Layer-No Net" (solid, remove dead copper, pour order 8): 1641.88,1295 1331.88,1295 1331.87,1600 1641.88,1600
VBATSENS on Top Layer "Bottom Layer-No Net" (solid, remove dead copper, pour order 30): 2280,1565 2280,1465 2165,1465 2055,1555 2055,1595 2280,1595
VBAT on Top Layer "Bottom Layer-No Net" (solid, remove dead copper, pour order 28): 2305,1595 2380,1595 2391.88,1595 2415,1595 2590,1595 2590,1465 2385,1465 2305,1465 2305,1565
VBATSENS on Top Layer "Bottom Layer-No Net" (solid, remove dead copper, pour order 26): 1705,1555 1640,1530 1570,1530 1331.88,1555 1331.88,1595 1705,1595
VBATSENS on Top Layer "Bottom Layer-No Net" (solid, remove dead copper, pour order 10): 506.88,40 16.88,40 16.88,1595 506.88,1595
GND on Top Layer "Bottom Layer-No Net" (solid, remove dead copper, pour order 14): 1496.88,245 1326.88,245 1326.88,420 1496.88,420
GND on Top Layer "Bottom Layer-No Net" (solid, remove dead copper, pour order 16): 1496.88,770 1326.88,770 1326.88,945 1496.88,945
GND on Top Layer "Bottom Layer-No Net" (solid, remove dead copper, pour order 18): 1641.88,1295 1331.88,1295 1331.88,1470 1641.88,1470
NetC15_2 on Top Layer "Bottom Layer-No Net" (solid, remove dead copper, pour order 20): 1026.88,1310 541.88,1310 541.88,1505 1026.88,1505
NetC11_2 on Top Layer "Bottom Layer-No Net" (solid, remove dead copper, pour order 22): 1026.88,785 541.88,785 541.88,990 1026.88,990
NetC7_2 on Top Layer "Bottom Layer-No Net" (solid, remove dead copper, pour order 24): 1026.88,265 541.88,265 541.88,465 1026.88,465

## Keep-outs
Keep-Out Layer:
  the board outline again, w10

## Dimensions
2076.88,1775 to 2626.88,0 on Mechanical 1
236.88,1780 to 0,1620 on Mechanical 1
2626.88,1615 to 0,1620 on Mechanical 1
2076.88,1775 to 551.88,1780 on Mechanical 1
2391.88,1775 to 2076.88,1775 on Mechanical 1
551.88,1780 to 236.88,1780 on Mechanical 1